# EAGLE board rfmboard (EAGLE 6.3)
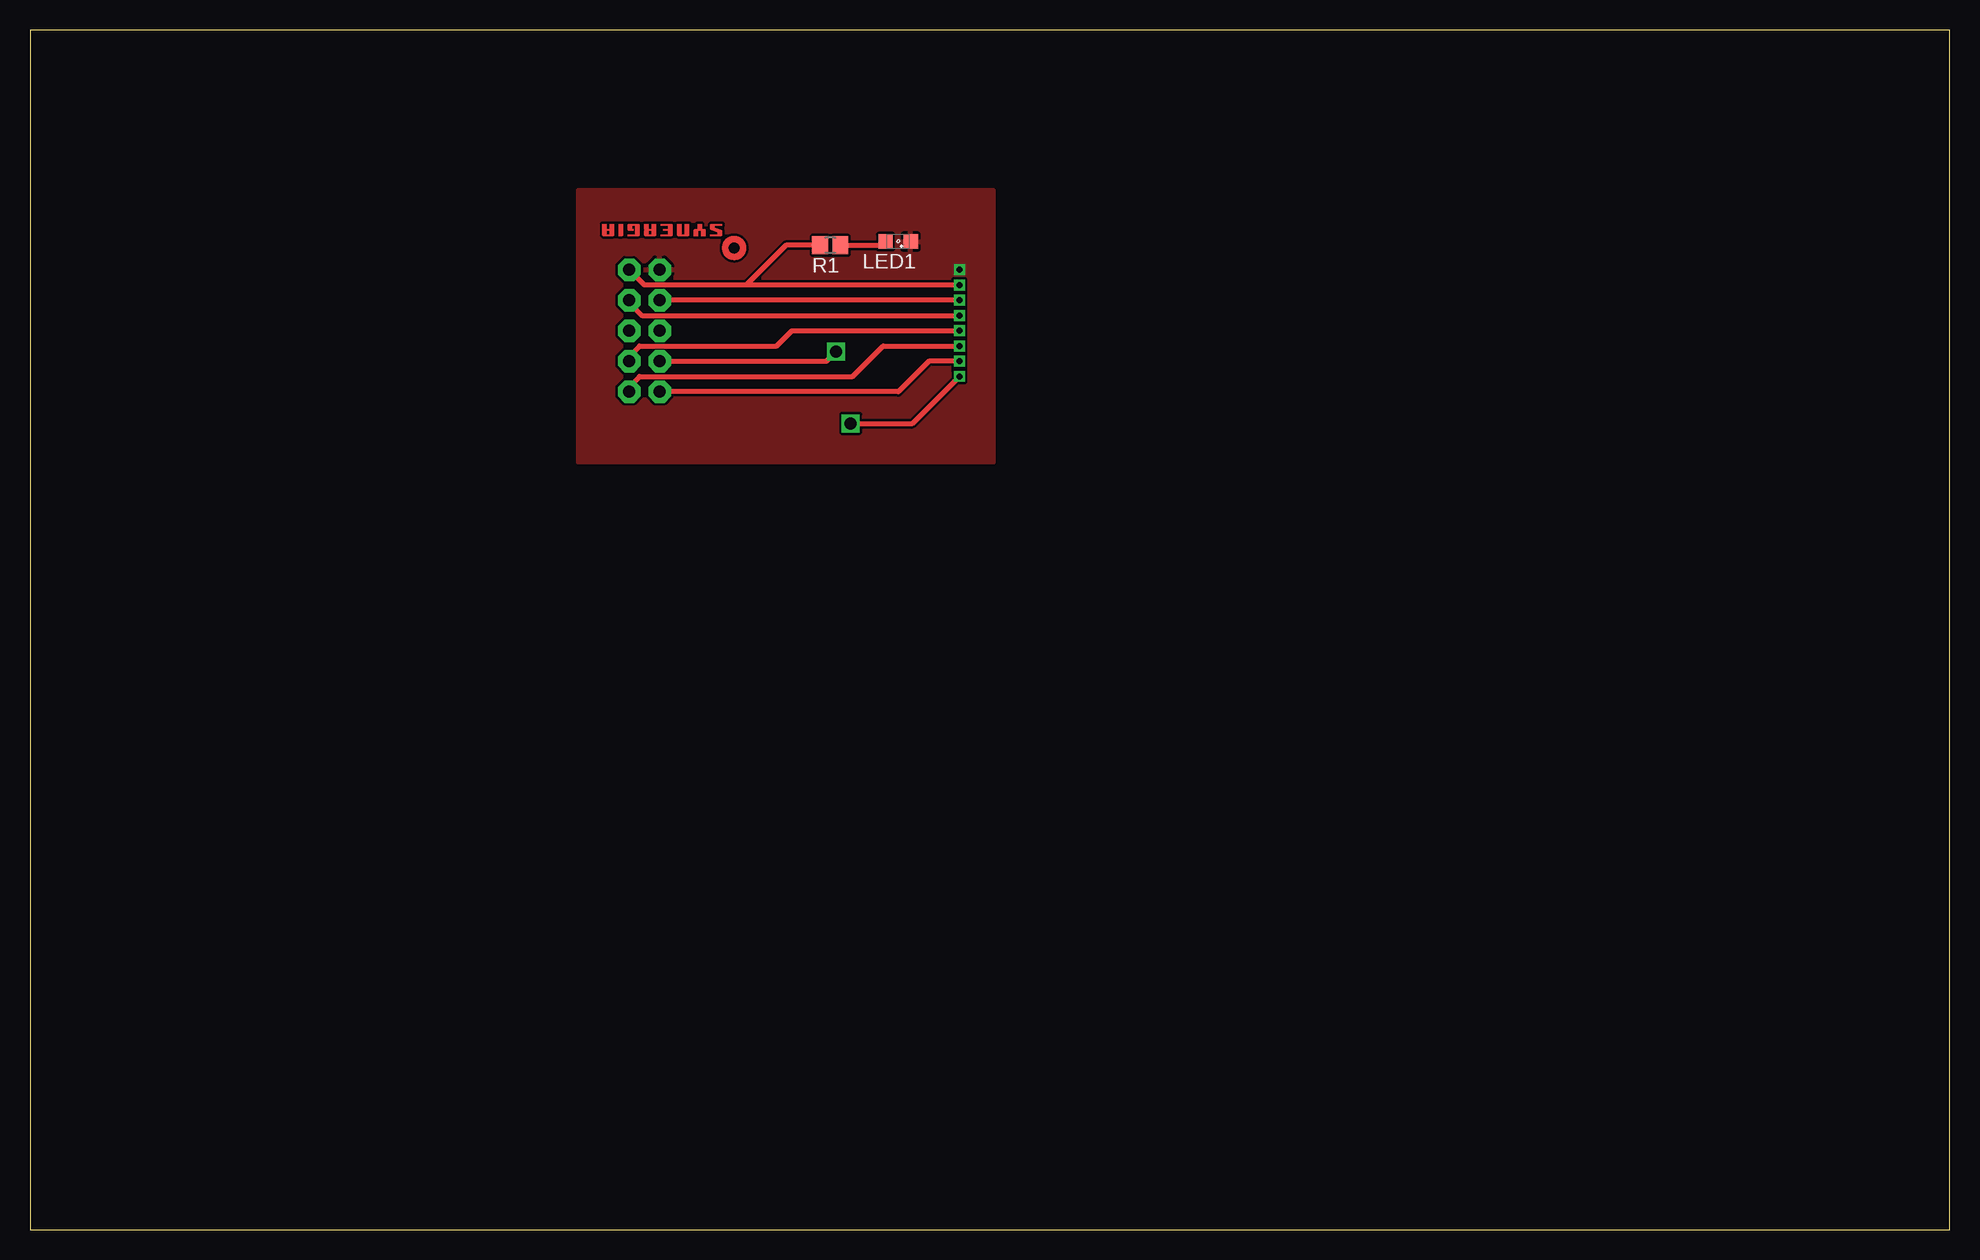
[diagram p0: board, top side]
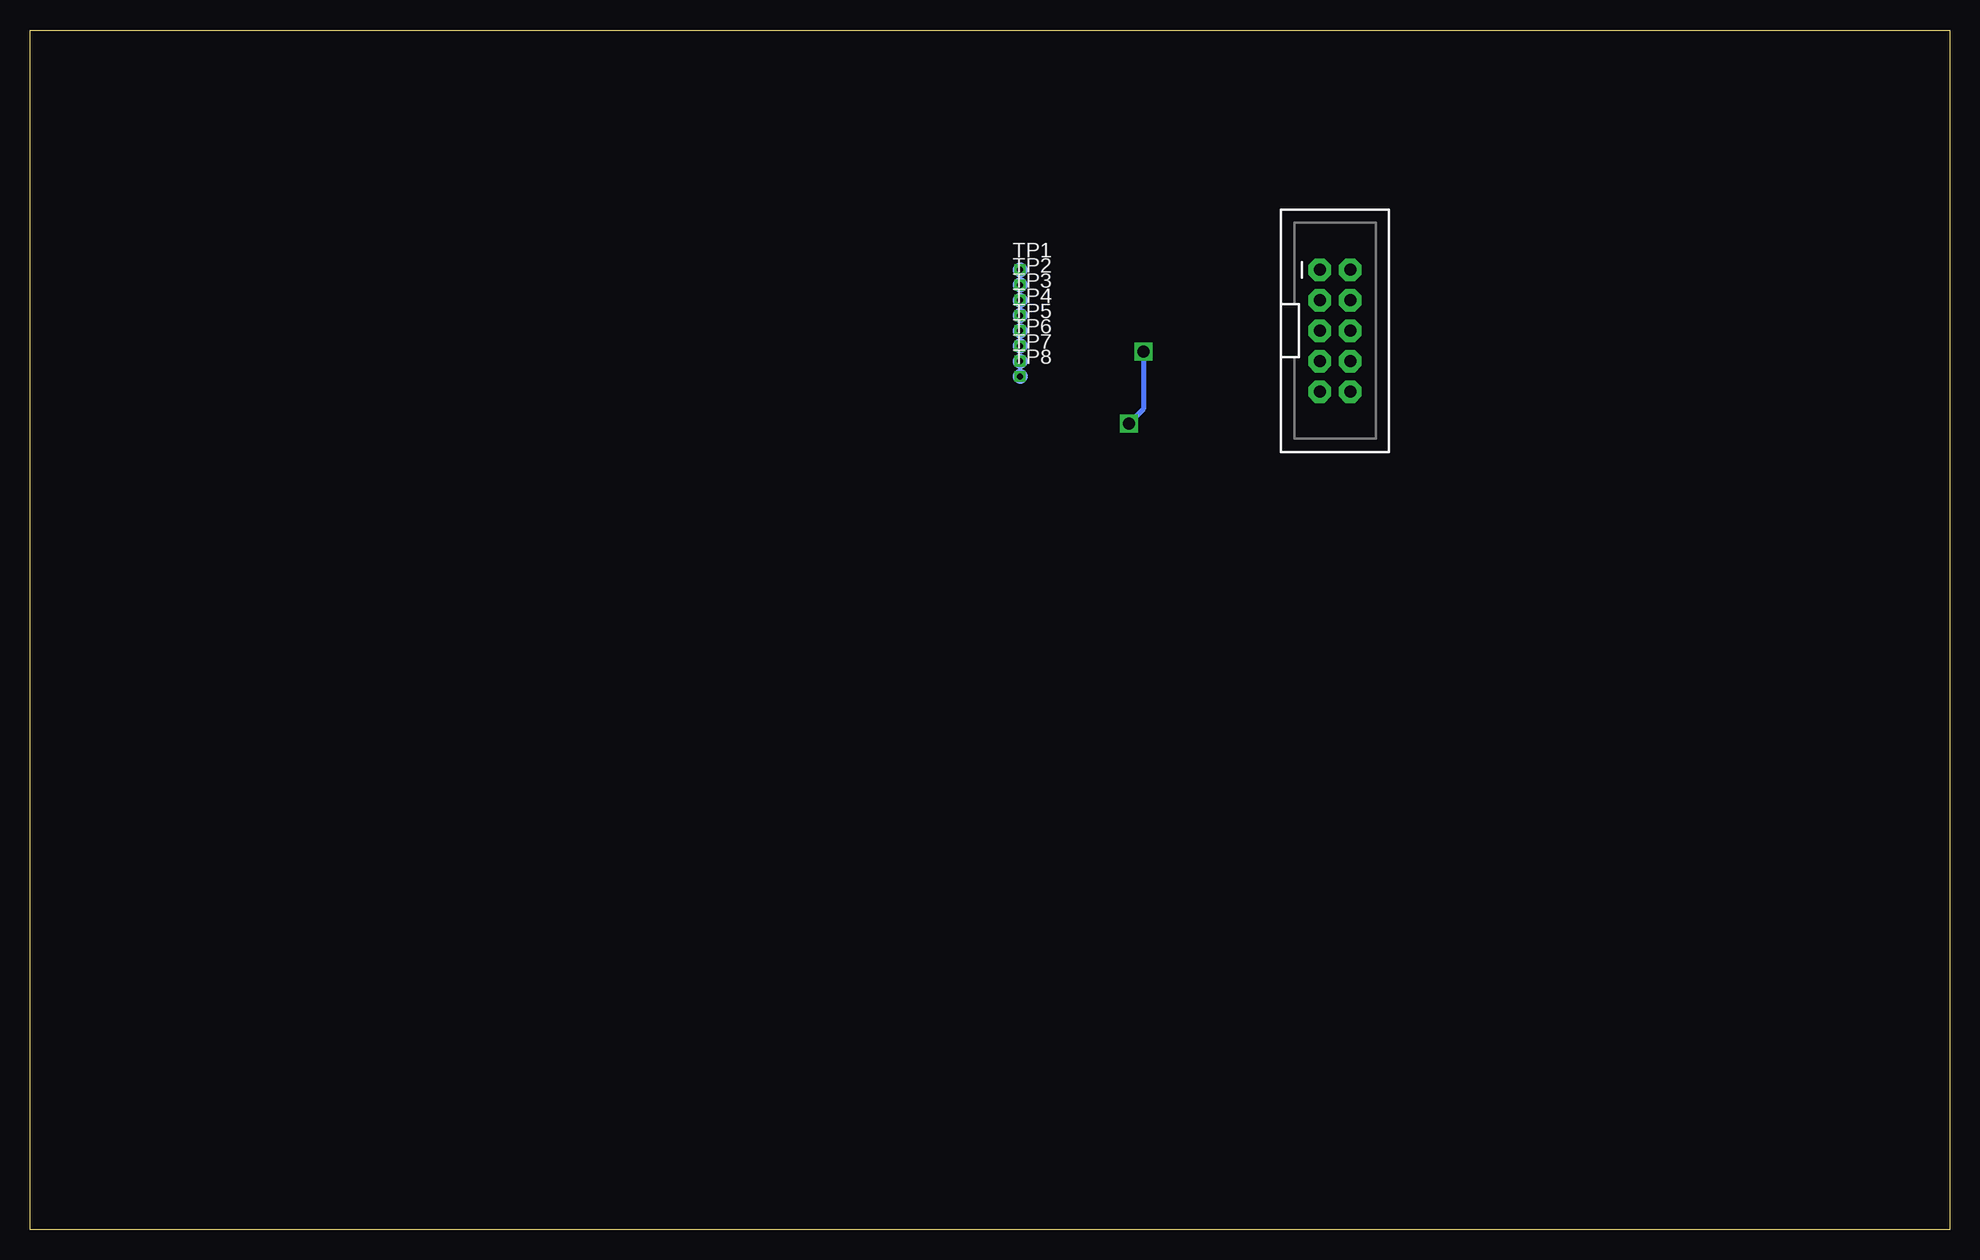
[diagram p1: board, bottom side, seen from below]

Size 160 x 100 mm. Coordinates in mm from the lower left corner, seen from the top.
Outline: 0,0 160,0 160,100 0,100 0,0
Copper layers (1*16): Top 0.035mm / dielectric 1.5mm / Bottom 0.035mm
Design rules "default": minimum track width 10mil, minimum drill 24mil, track to track 8mil, track to pad 8mil, pad to pad 8mil, via to via 8mil, smd to smd 8mil, copper to edge 40mil, drill to drill 8mil, minimum pad ring 10mil, minimum via ring 8mil, stop-mask expansion 4mil, vias tented up to drill 0mil, thermal gap 10mil

## Footprints (pad centres in the part's own frame; a part is rotated, then mirrored left to right if it is on the bottom)
2X5-SHROUDED = drill 1.016 pad 1.88 octagon: 1 -1.27,5.08; 2 1.27,5.08; 3 -1.27,2.54; 4 1.27,2.54; 5 -1.27,0; 6 1.27,0; 7 -1.27,-2.54; 8 1.27,-2.54; 9 -1.27,-5.08; 10 1.27,-5.08
SML0805 = smd 1.2 x 1.2: A 1.05,0; C -1.05,0
R0805 = smd 1.3 x 1.5: 1 -0.85,0; 2 0.85,0
B1,27 = smd 1.27 x 1.27: TP 0,0

## Placement (x,y rotation side)
JP3  M05X2SHD  [2X5-SHROUDED]  51.22,74.93 0 bottom
LED1  [SML0805]  72.36,82.37 180 top
R1  [R0805]  66.7,82.05 180 top
TP1  TPB1,27  [B1,27]  77.47,80.01 0 bottom
TP2  TPB1,27  [B1,27]  77.47,78.74 0 bottom
TP3  TPB1,27  [B1,27]  77.47,77.47 0 bottom
TP4  TPB1,27  [B1,27]  77.47,76.2 0 bottom
TP5  TPB1,27  [B1,27]  77.47,74.93 0 bottom
TP6  TPB1,27  [B1,27]  77.47,73.66 0 bottom
TP7  TPB1,27  [B1,27]  77.47,72.39 0 bottom
TP8  TPB1,27  [B1,27]  77.47,71.12 0 bottom
U$1  [SYNERGIA_12MM]  59.69,83.82 180 top

## Library data of the parts
JP3 = SparkFun-Connectors
LED1 = led
R1 = resistor
TP1-TP8 = testpad
U$1 = synergia_logo

## Nets
3.3V: JP3.2 R1.2 TP2.TP
CE: JP3.3 TP3.TP
CSN: JP3.4 TP4.TP
GND: JP3.1 LED1.C TP1.TP
MISO: JP3.9 TP7.TP
MOSI: JP3.10 TP6.TP
N$1: LED1.A R1.1
RX: JP3.5
SCK: JP3.8 TP5.TP
SS: JP3.7 TP8.TP
TX: JP3.6

## Tracks (layer width: path | path; a pad name or v marks a point on that pad's centre or on a via)
3.3V  (via drill 0.5)
  Top 0.406: TP2.TP 59.69,78.74 | 59.69,78.74 51.22,78.74 JP3.2 | R1.2 63,82.05 59.69,78.74
  other vias: 77.47,78.74
CE  (via drill 0.5)
  Top 0.406: TP3.TP JP3.3
  other vias: 77.47,77.47
CSN  (via drill 0.5)
  Top 0.406: JP3.4 49.95,77.25 51,76.2 TP4.TP
  other vias: 77.47,76.2
GND  (via drill 0.5)
  other vias: 77.47,80.01
  pour Top: 45.72,86.64 80.29,86.64 80.29,63.96 45.72,63.96
MISO  (via drill 0.5)
  Top 0.406: TP7.TP 74.93,72.39 72.39,69.85 JP3.9
  other vias: 77.47,72.39
MOSI  (via drill 0.5)
  Top 0.406: JP3.10 49.95,70.27 50.8,71.12 68.58,71.12 71.12,73.66 TP6.TP
  other vias: 77.47,73.66
N$1
  Top 0.406: R1.1 70.99,82.05 LED1.A
SCK  (via drill 0.5)
  Top 0.406: JP3.8 49.95,72.81 50.8,73.66 62.23,73.66 63.5,74.93 TP5.TP
  other vias: 77.47,74.93
SS  (via drill 0.5, 1)
  Top 0.406: JP3.7 66.39,72.39 v67.2,73.2 | v68.4,67.2 73.55,67.2 TP8.TP
  Bottom 0.406: v67.2,73.2 67.2,68.4 v68.4,67.2
  other vias: 77.47,71.12